# Altium PCB Pedal_SW_old.PcbDoc
Units mm, origin at the board's own origin, x right, y up, seen from the top; angles counter-clockwise.
Board outline 137.71 x 13.14 mm, 2 copper layers (Top Layer, Bottom Layer), stack 1.071 mm thick; 17 components, 33 nets, 102 pads, 8 vias.
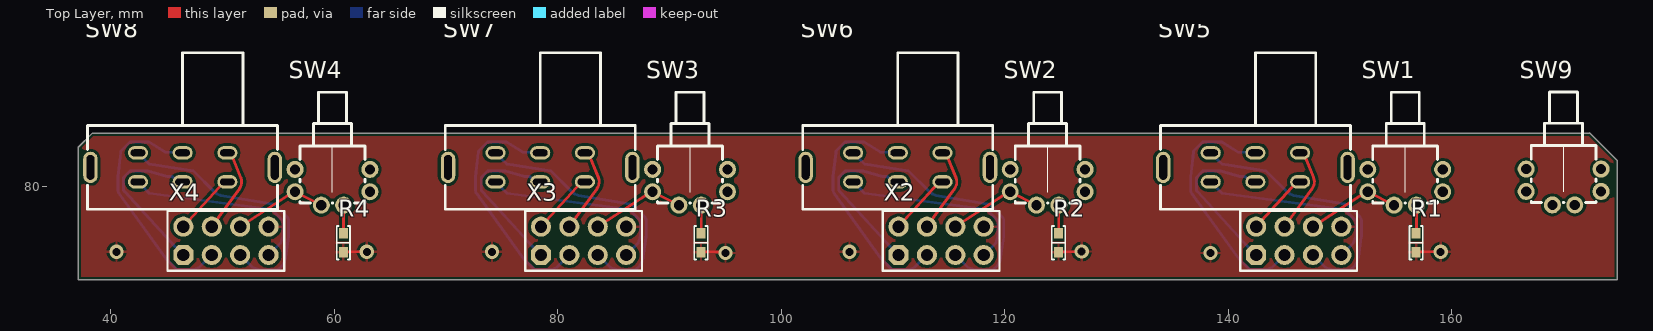
[diagram p0: Top Layer view]
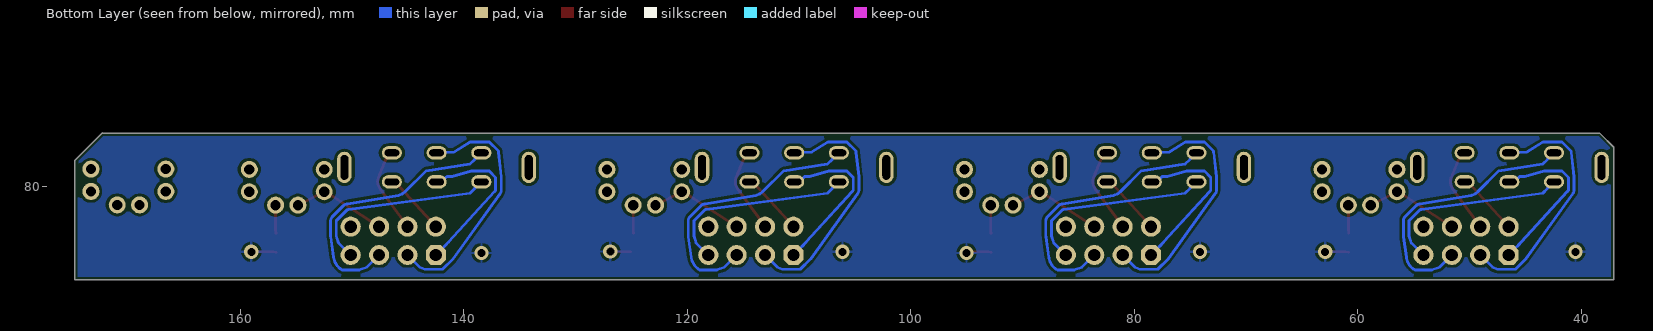
[diagram p1: Bottom Layer view, seen from below]
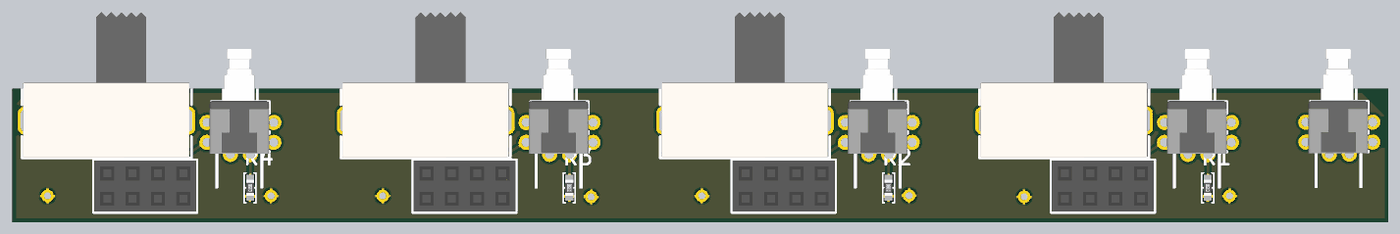
[diagram p2: 3D render of the assembled board from above, using the file's embedded part models]

## Layer stack, top to bottom
Top Solder: solder mask 0.0102, Solder Resist, Dk 3.5
Top Layer: signal copper 0.0356
Dielectric 1: dielectric 1, FR-4, Dk 4.8
Bottom Layer: signal copper 0.0356
Bottom Solder: solder mask 0.0102, Solder Resist, Dk 3.5

## Board outline
37.084,71.7 37.084,83.566 38.318,84.8 172.375,84.8 172.338,84.841 174.759,82.42 174.796,82.379 174.796,71.7

## Design rules (kind name [scope] priority, off if disabled: settings)
BoardOutlineClearance [All] p1: gap=0.254 ignorepadtopadclearanceinfootprint=FALSE except(0: Arc-SplitContinuation Track-SplitContinuation SMDPad-SplitContinuation THPad-SplitContinuation Via-SplitContinuation Fill-SplitContinuation Poly-SplitContinuation Region-SplitContinuation Text-SplitContinuation)
Clearance [All] p1: gap=0.254 ignorepadtopadclearanceinfootprint=FALSE
PolygonConnect [All] p1: connectstyle=Relief reliefconductorwidth=0.254 reliefentries=4 polygonreliefangle="90 Angle" airgapwidth=0.254
RoutingVias [All] p1: holewidth=0.711 width=1.27 viastyle="Through Hole" minholewidth=0.711 minwidth=1.27 maxholewidth=0.711 maxwidth=1.27
SolderMaskExpansion [All] p1: expansion=0.102 istentingtop=FALSE
Width [All] p1: maxlimit=0.254 minlimit=0.254 preferedwidth=0.254
30 further rules are at their usual default settings.

## Classes and differential pairs
component class Pedal_SW: R1 R2 R3 R4 SW1 SW2 SW3 SW4 SW5 SW6 SW7 SW8 SW9 X2 X3 X4

## Components (designator, comment, footprint, x,y, rotation, side; value= is the part's Value field where it differs from the comment)
R1 "510 Ohms" "YAGEO RES 0603_1608" 156.808,75.01 r270 top
R2 "510 Ohms" "YAGEO RES 0603_1608" 124.804,75.01 r270 top
R3 "510 Ohms" "YAGEO RES 0603_1608" 92.8,75.01 r270 top
R4 "510 Ohms" "YAGEO RES 0603_1608" 60.796,75.01 r270 top
SW1 "PushSwitch_DPDT" TK-6580A-1 159.178,81.575 r180 top
SW2 "PushSwitch_DPDT" TK-6580A-1 127.178,81.575 r180 top
SW3 "PushSwitch_DPDT" TK-6580A-1 95.178,81.575 r180 top
SW4 "PushSwitch_DPDT" TK-6580A-1 63.178,81.575 r180 top
SW5 "SlideSwitch_DPDT" SK-22F03-G060 142.419,83.058 r180 top
SW6 "SlideSwitch_DPDT" SK-22F03-G060 110.419,83.058 r180 top
SW7 "SlideSwitch_DPDT" SK-22F03-G060 78.419,83.058 r180 top
SW8 "SlideSwitch_DPDT" SK-22F03-G060 46.419,83.058 r180 top
SW9 "PushSwitch_DPDT" TK-6580A-1 173.35,81.6 r180 top
X1 "Connector, 8pin, 2.54mm, 500VAC, 3A" "CON: PBD-8" 146.296,75.184 r0 top
X2 "Connector, 8pin, 2.54mm, 500VAC, 3A" "CON: PBD-8" 114.296,75.184 r0 top
X3 "Connector, 8pin, 2.54mm, 500VAC, 3A" "CON: PBD-8" 82.296,75.184 r0 top
X4 "Connector, 8pin, 2.54mm, 500VAC, 3A" "CON: PBD-8" 50.296,75.184 r0 top

## Footprints (in the part's own frame and the unit in brackets; to place one, negate y for a bottom-side part, rotate by r counter-clockwise, add the part's x,y. Pads: shape width x height; smd on the part's side, far side on the other; paste and mask are expansions set on the pad)
"CON: PBD-8" [mm] "PBD-8"
  oct 1.8x1.8 hole 1.1: 1(-3.81,-1.27)
  round 1.8 hole 1.1: 2(-3.81,1.27) 3(-1.27,-1.27) 4(-1.27,1.27) 5(1.27,-1.27) 6(1.27,1.27) 7(3.81,-1.27) 8(3.81,1.27)
  silkscreen extent -5.23,-2.68 5.23,2.68, body extent -5.08,-2.54 5.08,2.54, height 8.5
SK-22F03-G060 [mm] "G-Switch SK-22F03-G060"
  oval 1.8x1.2 hole 0.6 slot 1.3 at 0 deg paste-2539.97 mask+0.05: 1(-4,0) 2(0,0) 3(4,0) 4(4,2.6) 5(0,2.6) 6(-4,2.6)
  oval 1.3x2.8 hole 0.7 slot 2.2 at 90 deg paste-2539.97 mask+0.05: 7(-8.25,1.3) 8(8.25,1.3)
  silkscreen extent -8.5,-8.95 8.5,5.05, body extent -8.32,-9.59 8.38,5.01, height 9
TK-6580A-1 [mil] "Pushbutton switch"
  round 60 hole 36 paste-99999 mask+2: 1(263.78,0) 2(263.78,78.74) 3(0,0) 4(0,78.74) 5(171.26,125.98) 6(92.52,125.98)
  silkscreen extent 18,-272 246,118, body extent 18,-291 254,261, height 317
"YAGEO RES 0603_1608" [mm] "Chip Resistor, 2-Leads, Body 1.60x0.80mm"
  rect 0.9x0.8 smd: 1(-0.85,0) 2(0.85,0)
  silkscreen extent -1.5,-0.6 1.5,0.6, body extent -0.8,-0.4 0.8,0.4, height 0.45

## Part data
R1 R2 R3 R4: library part AC0603FR-07510RL, "RES SMD 510 OHM 1% 1/10W 0603", Device Package="0603 (1608 Metric)", Manufacturer=Yageo, Operating Temperature="-55°C ~ 155°C", Power (Watts)="0.1W, 1/10W", Ratings=AEC-Q200, Supplier Device Package=0603, Supplier Part Number 1=YAG3615CT-ND, Temperature Coefficient=±100ppm/°C, Tolerance=±1%, ComponentLink1Description=Datasheet, ComponentLink1URL=https://www.yageo.com/upload/media/product/productsearch/datasheet/rchip/PYu-AC_51_RoHS_L_7.pdf, ComponentLink2Description="DigiKey Link", ComponentLink2URL=https://www.digikey.com/en/products/detail/yageo/AC0603FR-07510RL/5896175, Composition="Thick Film", Features="Automotive AEC-Q200, Moisture Resistant", Height - Seated (Max)="0.022\" (0.55mm)", LastUpdated="7/25/2024 9:19:25 AM", Lifecycle Status=Active, Minimum Order=1, Number of Terminations=2, Package / Case="0603 (1608 Metric)", Packaging=CutTape, Part Number=AC0603FR-07510RL, Part Status=Active, PartId=15979, Price=0.01, Resistance="510 Ohms", Series=AC, Size / Dimension="0.063\" L x 0.031\" W (1.60mm x 0.80mm)", Supplier 1=DigiKey
X1 X2 X3 X4: library part PBD-8, CurrentMax=3A, Manufacturer=Connfly, VoltageMax=500VAC, CommentText="\"Разъем\"", HelpURL=https://www.chipdip.ru/product/pbd-8, Multichannel=8pin, PartNumber=PBD-8, Pitch=2.54mm, TypeConnector=Connector, ValueManufacturerPartNumber="Connector, 8pin, 2.54mm, 500VAC, 3A"

## Via types
v1: diameter 1.27, hole 0.711, Top Layer to Bottom Layer, 8 vias

## Nets (pads, with @x,y where several pads share a name; then routed paths per layer and width w, separated by ;. In a path a pad name is that pad's centre, name@x,y a point inside that pad or via, vN(x,y) a via of type N, cw(c..) or ccw(c..) an arc to the next point about the centre after c; other vN are vias at no path point)
GND_A: R1.2 R2.2 R3.2 R4.2 X1.8 X2.8 X3.8 X4.8 | length 8.1
  Top Layer w0.254: R4.2 61.069,74.2 v1(62.9,74.2) ; R3.2@92.796,74.16 93.069,74.2 v1@94.9,74.2 ; R2.2@125.069,74.2 126.846,74.2 v1(126.873,74.227) ; R1.2@156.796,74.16 157.069,74.2 v1@158.9,74.2
  other v1: 95,74.1 138.4,74.1 40.5,74.2 74.1,74.2 106.1,74.2 159,74.2
NetR1_1: R1.1 SW1.6 | length 2.5
  Top Layer w0.254: R1.1@156.796,75.86 156.828,76.183 SW1.6
NetR2_1: R2.1 SW2.6 | length 2.5
  Top Layer w0.254: R2.1@124.796,75.86 124.828,76.183 SW2.6
NetR3_1: R3.1 SW3.6 | length 2.5
  Top Layer w0.254: R3.1@92.796,75.86 92.828,76.183 SW3.6
NetR4_1: R4.1 SW4.6 | length 2.5
  Top Layer w0.254: R4.1 60.828,76.183 SW4.6
NetSW1_2: SW1.2 SW1.5 X1.6 | length 8.5
  Top Layer w0.254: X1.6 152.278,79.534 cw(c152.417,79.321) 152.417,79.575 SW1.2 SW1.5
NetSW2_2: SW2.2 SW2.5 X2.6 | length 8.5
  Top Layer w0.254: X2.6 120.278,79.534 cw(c120.417,79.321) 120.417,79.575 SW2.2 SW2.5@122.828,78.375
NetSW3_2: SW3.2 SW3.5 X3.6 | length 8.5
  Top Layer w0.254: X3.6 88.278,79.534 cw(c88.417,79.321) 88.417,79.575 SW3.2 SW3.5
NetSW4_2: SW4.2 SW4.5 X4.6 | length 8.5
  Top Layer w0.254: X4.6 56.278,79.534 cw(c56.417,79.321) 56.417,79.575 SW4.2 SW4.5
SW1_1: SW5.1 X1.4 | length 7.9
  Top Layer w0.254: X1.4 147.513,79.882 ccw(c146.719,80.458) 147.628,80.828 146.719,83.058 SW5.1
SW1_2: SW6.1 X2.4 | length 7.9
  Top Layer w0.254: X2.4 115.513,79.882 ccw(c114.719,80.458) 115.628,80.828 114.719,83.058 SW6.1
SW1_3: SW7.1 X3.4 | length 7.9
  Top Layer w0.254: X3.4 83.513,79.882 ccw(c82.719,80.458) 83.627,80.828 82.719,83.058 SW7.1
SW1_4: SW8.1 X4.4 | length 7.9
  Top Layer w0.254: X4.4 51.513,79.882 ccw(c50.719,80.458) 51.627,80.828 50.719,83.058 SW8.1
SW2_1: SW5.2 X1.3 | length 22.1
  Bottom Layer w0.254: SW5.2 142.119,83.058 141.645,83.109 140.883,83.109 139.381,84.039 137.713,84.039 136.895,83.221 136.88,83.108 ccw(c137.258,83.058) 136.879,83.101 136.633,80.921 ccw(c137.138,80.864) 136.63,80.864 136.63,79.708 ccw(c137.138,79.708) 136.726,79.41 140.951,73.56 141.878,72.633 143.475,72.633 143.941,72.829 X1.3
SW2_2: SW6.2 X2.3 | length 22.1
  Bottom Layer w0.254: SW6.2 110.119,83.058 109.645,83.109 108.883,83.109 107.381,84.039 105.713,84.039 104.895,83.221 104.88,83.108 ccw(c105.258,83.058) 104.879,83.101 104.633,80.921 ccw(c105.138,80.864) 104.63,80.864 104.63,79.708 ccw(c105.138,79.708) 104.726,79.41 108.951,73.56 109.878,72.633 111.475,72.633 111.941,72.829 X2.3
SW2_3: SW7.2 X3.3 | length 22.1
  Bottom Layer w0.254: 72.633,80.921 ccw(c73.138,80.864) 72.63,80.864 72.63,79.708 ccw(c73.138,79.708) 72.726,79.41 76.951,73.56 77.878,72.633 79.475,72.633 79.941,72.829 X3.3 ; 72.633,80.921 72.879,83.101 cw(c73.258,83.058) 72.88,83.108 72.895,83.221 73.713,84.039 75.381,84.039 76.883,83.109 77.645,83.109 78.119,83.058 SW7.2
SW2_4: SW8.2 X4.3 | length 22.1
  Bottom Layer w0.254: SW8.2 46.119,83.058 45.645,83.109 44.883,83.109 43.381,84.039 41.713,84.039 40.895,83.221 40.88,83.108 ccw(c41.258,83.058) 40.879,83.101 40.633,80.921 ccw(c41.138,80.864) 40.63,80.864 40.63,79.708 ccw(c41.138,79.708) 40.726,79.41 44.951,73.56 45.878,72.633 47.475,72.633 47.941,72.829 X4.3
SW3_1: SW5.3 X1.5 | length 24.2
  Bottom Layer w0.254: SW5.3 138.719,83.058 139.009,82.468 139.43,82.047 143.381,81.439 145.241,79.58 ccw(c145.51,79.849) 145.278,79.547 145.456,79.41 ccw(c145.688,79.712) 145.543,79.36 145.75,79.274 ccw(c145.896,79.626) 145.833,79.25 150.405,78.485 cw(c150.258,77.608) 150.488,78.467 150.541,78.452 cw(c150.41,77.962) 150.769,78.321 151.755,77.335 cw(c151.395,76.977) 151.903,76.977 151.903,75.616 cw(c151.395,75.616) 151.898,75.545 151.637,73.709 cw(c151.26,73.762) 151.628,73.663 151.549,73.37 cw(c151.181,73.469) 151.511,73.278 151.359,73.015 cw(c151.029,73.205) 151.299,72.936 151.084,72.721 cw(c150.815,72.991) 151.005,72.661 150.867,72.581 149.345,72.581 148.651,72.829 X1.5
SW3_2: SW6.3 X2.5 | length 24.2
  Bottom Layer w0.254: SW6.3 106.719,83.058 107.009,82.468 107.43,82.047 111.381,81.439 113.241,79.58 ccw(c113.51,79.849) 113.278,79.547 113.456,79.41 ccw(c113.688,79.712) 113.543,79.36 113.75,79.274 ccw(c113.896,79.626) 113.833,79.25 118.405,78.485 cw(c118.258,77.608) 118.488,78.467 118.541,78.452 cw(c118.41,77.962) 118.769,78.321 119.755,77.335 cw(c119.395,76.977) 119.903,76.977 119.903,75.616 cw(c119.395,75.616) 119.898,75.545 119.637,73.709 cw(c119.26,73.762) 119.628,73.663 119.549,73.37 cw(c119.181,73.469) 119.511,73.278 119.359,73.015 cw(c119.029,73.205) 119.299,72.936 119.084,72.721 cw(c118.815,72.991) 119.005,72.661 118.867,72.581 117.345,72.581 116.651,72.829 X2.5
SW3_3: SW7.3 X3.5 | length 24.2
  Bottom Layer w0.254: SW7.3 74.719,83.058 75.009,82.468 75.43,82.047 79.381,81.439 81.241,79.58 ccw(c81.51,79.849) 81.278,79.547 81.456,79.41 ccw(c81.688,79.712) 81.542,79.36 81.75,79.274 ccw(c81.896,79.626) 81.833,79.25 86.405,78.485 cw(c86.258,77.608) 86.488,78.467 86.541,78.452 cw(c86.41,77.962) 86.769,78.321 87.755,77.335 cw(c87.395,76.977) 87.903,76.977 87.903,75.616 cw(c87.395,75.616) 87.898,75.545 87.637,73.709 cw(c87.26,73.762) 87.628,73.663 87.549,73.37 cw(c87.181,73.469) 87.511,73.278 87.359,73.015 cw(c87.029,73.205) 87.299,72.936 87.084,72.721 cw(c86.815,72.991) 87.005,72.661 86.867,72.581 85.345,72.581 84.651,72.829 X3.5
SW3_4: SW8.3 X4.5 | length 24.2
  Bottom Layer w0.254: SW8.3 42.719,83.058 43.009,82.468 43.43,82.047 47.381,81.439 49.241,79.58 ccw(c49.51,79.849) 49.278,79.547 49.456,79.41 ccw(c49.688,79.712) 49.543,79.36 49.75,79.274 ccw(c49.896,79.626) 49.833,79.25 54.405,78.485 cw(c54.258,77.608) 54.488,78.467 54.541,78.452 cw(c54.41,77.962) 54.769,78.321 55.755,77.335 cw(c55.395,76.977) 55.903,76.977 55.903,75.616 cw(c55.395,75.616) 55.898,75.545 55.637,73.709 cw(c55.26,73.762) 55.628,73.663 55.549,73.37 cw(c55.181,73.469) 55.511,73.278 55.359,73.015 cw(c55.029,73.205) 55.299,72.936 55.084,72.721 cw(c54.815,72.991) 55.005,72.661 54.867,72.581 53.345,72.581 52.651,72.829 X4.5
SW4_1: SW5.4 X1.7 | length 17.6
  Bottom Layer w0.254: SW5.4 138.719,80.458 139.009,79.868 139.43,79.447 150.309,77.986 cw(c150.258,77.608) 150.357,77.976 150.41,77.962 151.395,76.977 151.395,75.616 151.191,74.999 X1.7
SW4_2: SW6.4 X2.7 | length 17.6
  Bottom Layer w0.254: SW6.4 106.719,80.458 107.009,79.868 107.43,79.447 118.309,77.986 cw(c118.258,77.608) 118.357,77.976 118.41,77.962 119.395,76.977 119.395,75.616 119.191,74.999 X2.7
SW4_3: SW7.4 X3.7 | length 17.6
  Bottom Layer w0.254: SW7.4 74.719,80.458 75.009,79.868 75.43,79.447 86.309,77.986 cw(c86.258,77.608) 86.357,77.976 86.41,77.962 87.395,76.977 87.395,75.616 87.191,74.999 X3.7
SW4_4: SW8.4 X4.7 | length 17.6
  Bottom Layer w0.254: SW8.4 42.719,80.458 43.009,79.868 43.43,79.447 54.309,77.986 cw(c54.258,77.608) 54.357,77.976 54.41,77.962 55.395,76.977 55.395,75.616 55.191,74.999 X4.7
SW5_1: SW5.5 X1.1 | length 14.8
  Bottom Layer w0.254: SW5.5 142.119,80.458 141.566,80.862 141.497,80.931 141.025,80.931 139.32,81.439 137.713,81.439 137.138,80.864 137.138,79.708 137.208,79.617 ccw(c137.51,79.849) 137.228,79.592 141.362,75.059 141.613,74.787 141.901,74.499 X1.1
SW5_2: SW6.5 X2.1 | length 14.8
  Bottom Layer w0.254: SW6.5 110.119,80.458 109.566,80.862 109.497,80.931 109.025,80.931 107.32,81.439 105.713,81.439 105.138,80.864 105.138,79.708 105.208,79.617 ccw(c105.51,79.849) 105.228,79.592 109.362,75.059 109.613,74.787 109.901,74.499 X2.1
SW5_3: SW7.5 X3.1 | length 14.8
  Bottom Layer w0.254: SW7.5 78.119,80.458 77.566,80.862 77.497,80.931 77.024,80.931 75.32,81.439 73.713,81.439 73.138,80.864 73.138,79.708 73.208,79.617 ccw(c73.51,79.849) 73.228,79.592 77.361,75.059 77.613,74.787 77.901,74.499 X3.1
SW5_4: SW8.5 X4.1 | length 14.8
  Bottom Layer w0.254: SW8.5 46.119,80.458 45.566,80.862 45.497,80.931 45.025,80.931 43.32,81.439 41.713,81.439 41.138,80.864 41.138,79.708 41.208,79.617 ccw(c41.51,79.849) 41.228,79.592 45.361,75.059 45.613,74.787 45.901,74.499 X4.1
SW6_1: SW5.6 X1.2 | length 5.7
  Top Layer w0.254: X1.2 146.119,80.458 SW5.6
SW6_2: SW6.6 X2.2 | length 5.7
  Top Layer w0.254: X2.2 114.119,80.458 SW6.6
SW6_3: SW7.6 X3.2 | length 5.7
  Top Layer w0.254: X3.2 82.119,80.458 SW7.6
SW6_4: SW8.6 X4.2 | length 5.7
  Top Layer w0.254: X4.2 50.119,80.458 SW8.6
pads on no net: SW1.1 SW1.3 SW1.4 SW2.1 SW2.3 SW2.4 SW3.1 SW3.3 SW3.4 SW4.1 SW4.3 SW4.4 SW5.7 SW5.8 SW6.7 SW6.8 SW7.7 SW7.8 SW8.7 SW8.8 SW9.1 SW9.2 SW9.3 SW9.4 SW9.5 SW9.6

## Polygon pours and split planes (outlines as drawn)
GND_A on Bottom Layer "NONET_L02_P-001" (solid, remove dead copper, pour order 1): 37.211,85.598 174.752,85.598 174.752,67.183 37.211,67.183
GND_A on Top Layer "NONET_L02_P-001" (solid, remove dead copper, pour order 0): 37.211,85.598 174.752,85.598 174.752,67.183 37.211,67.183

## Silkscreen, mask and mechanical layers (free items; w line width, h text height)
Board:
  lines w0.254: 172.338,84.841 174.759,82.42 ; 172.375,84.8 38.318,84.8 37.084,83.566 37.084,71.7 174.796,71.7 174.796,82.379